# EAGLE board panelBoard_old (EAGLE 6.5.0)
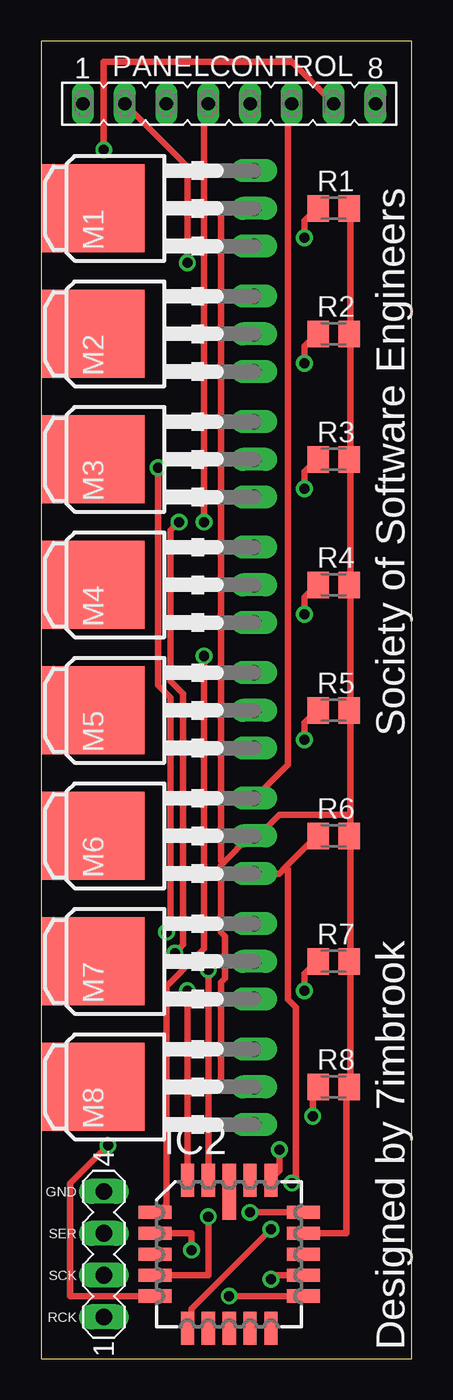
[diagram p0: board, top side]
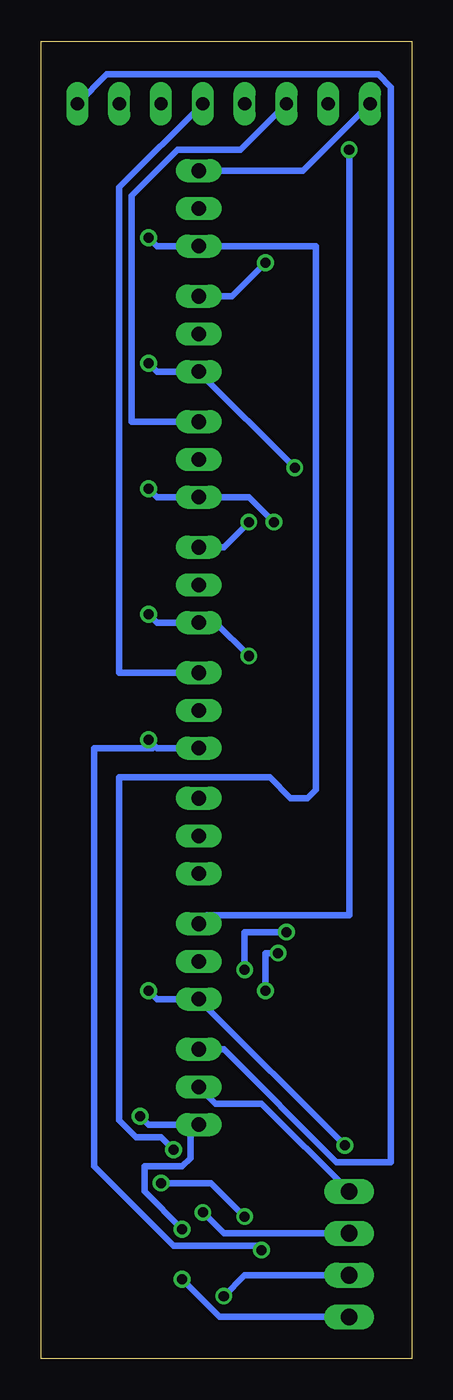
[diagram p1: board, bottom side, seen from below]

Size 22.53 x 80 mm. Coordinates in mm from the lower left corner, seen from the top.
Outline: 0,0 22.53,0 22.53,80 0,80 0,0
Copper layers (1*16): Top 0.035mm / dielectric 1.5mm / Bottom 0.035mm
Design rules "default": minimum track width 10mil, minimum drill 24mil, track to track 8mil, track to pad 8mil, pad to pad 8mil, via to via 8mil, smd to smd 8mil, copper to edge 40mil, drill to drill 8mil, minimum pad ring 10mil, minimum via ring 8mil, stop-mask expansion 4mil, vias tented up to drill 0mil, thermal gap 10mil
Net classes: 0 default: width 0.381 mm, drill 0.508 mm, clearance 0.254 mm

## Footprints (pad centres in the part's own frame; a part is rotated, then mirrored left to right if it is on the bottom)
MA04-1 = drill 1.016 long: 1 -3.81,0; 2 -1.27,0; 3 1.27,0; 4 3.81,0
LCC20 = smd 0.8 x 3.4: 1 0,3.8 | smd 0.8 x 2: 2 -1.27,4.5; 3 -2.54,4.5; 9 -2.54,-4.5; 10 -1.27,-4.5; 11 0,-4.5; 12 1.27,-4.5; 13 2.54,-4.5; 19 2.54,4.5; 20 1.27,4.5 | smd 2 x 0.8: 4 -4.5,2.54; 5 -4.5,1.27; 6 -4.5,0; 7 -4.5,-1.27; 8 -4.5,-2.54; 14 4.5,-2.54; 15 4.5,-1.27; 16 4.5,0; 17 4.5,1.27; 18 4.5,2.54
I-PAK_TO251AA = drill 0.889 long: 1 -2.286,-5.334; 2 0,-5.334; 3 2.286,-5.334 | smd 5.334 x 6.223: 4 0,4.445
FE08 = drill 0.813 long: 1 -8.89,0; 2 -6.35,0; 3 -3.81,0; 4 -1.27,0; 5 1.27,0; 6 3.81,0; 7 6.35,0; 8 8.89,0
M0805 = smd 1.3 x 1.6: 1 -0.95,0; 2 0.95,0

## Placement (x,y rotation side)
CONTROL  [MA04-1]  3.81,6.35 90 top
IC2  74LS595FK  [LCC20]  11.43,6.35 0 top
M1  IRFU5305  [I-PAK_TO251AA]  7.62,69.85 90 top
M2  IRFU5305  [I-PAK_TO251AA]  7.62,62.23 90 top
M3  IRFU5305  [I-PAK_TO251AA]  7.62,54.61 90 top
M4  IRFU5305  [I-PAK_TO251AA]  7.62,46.99 90 top
M5  IRFU5305  [I-PAK_TO251AA]  7.62,39.37 90 top
M6  IRFU5305  [I-PAK_TO251AA]  7.62,31.75 90 top
M7  IRFU5305  [I-PAK_TO251AA]  7.62,24.13 90 top
M8  IRFU5305  [I-PAK_TO251AA]  7.62,16.51 90 top
PANELCONTROL  [FE08]  11.43,76.2 0 top
R1  [M0805]  17.78,69.85 0 top
R2  [M0805]  17.78,62.23 0 top
R3  [M0805]  17.78,54.61 0 top
R4  [M0805]  17.78,46.99 0 top
R5  [M0805]  17.78,39.37 0 top
R6  [M0805]  17.78,31.75 0 top
R7  [M0805]  17.78,24.13 0 top
R8  [M0805]  17.78,16.51 0 top

## Library data of the parts
CONTROL = con-lstb; OC_FARNELL: unknown; OC_NEWARK: unknown
IC2 = 74xx-eu; OC_NEWARK: unknown
M1-M8 = transistor-power; MF: INTERNATIONAL RECTIFIER(IR); MPN: IRFU5305PBF; OC_NEWARK: 63J7093
PANELCONTROL = con-lsta; OC_FARNELL: unknown; OC_NEWARK: unknown
R1-R8 = resistor

## Nets
GND: IC2.10
N$1: M1.3 PANELCONTROL.1
N$2: M2.3 PANELCONTROL.2
N$3: M3.3 PANELCONTROL.3
N$4: M4.3 PANELCONTROL.4
N$5: M5.3 PANELCONTROL.5
N$6: M6.3 PANELCONTROL.6
N$7: M7.3 PANELCONTROL.7
N$8: M8.3 PANELCONTROL.8
N$9: CONTROL.4 IC2.17 M1.2 M2.2 M3.2 M4.2 M5.2 M6.2 M7.2 M8.2 R1.2 R2.2 R3.2 R4.2 R5.2 R6.2 R7.2 R8.2
N$10: IC2.9 M8.1 R8.1
N$11: IC2.19 M1.1 R1.1
N$12: IC2.2 M2.1 R2.1
N$13: IC2.3 M3.1 R3.1
N$14: IC2.4 M4.1 R4.1
N$15: IC2.5 M5.1 R5.1
N$16: IC2.7 M6.1 R6.1
N$17: IC2.8 M7.1 R7.1
N$21: CONTROL.3 IC2.18
N$22: CONTROL.2 IC2.14
N$23: CONTROL.1 IC2.15
VCC: IC2.20

## Tracks (layer width: path | path; a pad name or v marks a point on that pad's centre or on a via)
N$1
  Bottom 0.381: PANELCONTROL.1 6.6,72.14 M1.3
N$2  (via drill 0.61)
  Top 0.381: PANELCONTROL.2 8.89,72.39 v8.89,66.55
  Bottom 0.381: v8.89,66.55 10.92,64.52 M2.3
N$3
  Bottom 0.381: PANELCONTROL.3 10.41,73.41 14.22,73.41 17.02,70.61 17.02,56.9 M3.3
N$4  (via drill 0.61)
  Top 0.381: PANELCONTROL.4 9.91,75.95 v9.91,50.8
  Bottom 0.381: v9.91,50.8 11.43,49.28 M4.3
N$5
  Bottom 0.381: PANELCONTROL.5 17.78,71.12 17.78,41.66 M5.3
N$6
  Top 0.381: PANELCONTROL.6 14.99,75.95 14.99,36.07 M6.3
N$7  (via drill 0.61)
  Top 0.381: PANELCONTROL.7 15.24,78.74 3.81,78.74 v3.81,73.41
  Bottom 0.381: v3.81,73.41 3.81,26.92 12.45,26.92 M7.3
N$8
  Bottom 0.381: PANELCONTROL.8 18.54,77.98 2.03,77.98 1.27,77.22 1.27,11.94 4.57,11.94 11.43,18.8 M8.3
N$9
  Top 0.381: 18.8,62.23 18.8,69.85 R1.2 | 18.8,54.61 18.8,46.99 | 18.8,39.37 18.8,33.02 | 18.8,33.02 18.8,31.75 | 18.8,24.13 18.8,16.51 R8.2 18.54,16.51 18.54,7.62 IC2.17 | 18.8,24.13 18.8,31.75 | 18.8,31.75 R6.2 | 18.8,24.13 R7.2 | 18.8,39.37 18.8,46.99 | 18.8,46.99 R4.2 | 18.8,39.37 R5.2 | 18.8,54.61 18.8,62.23 | 18.8,62.23 R2.2 | 18.8,54.61 R3.2 | 11.18,24.13 M7.2 | 11.18,24.13 11.18,25.65 10.92,25.91 10.92,29.97 11.05,30.1 | 11.05,30.1 12.7,31.75 M6.2 13.21,31.75 14.48,33.02 18.8,33.02 | 10.92,39.37 M5.2 | 10.92,39.37 10.92,30.23 11.05,30.1 | 10.92,46.99 M4.2 | 10.92,39.37 10.92,46.99 | 10.92,54.61 M3.2 | 10.92,46.99 10.92,54.61 | 10.92,62.23 M2.2 | 10.92,54.61 10.92,62.23 | M1.2 10.92,69.85 10.92,62.23 | M8.2 10.92,16.51 10.92,22.86 11.18,23.11 11.18,24.13
  Bottom 0.381: M8.2 11.94,15.49 9.14,15.49 CONTROL.4
N$10  (via drill 0.61)
  Top 0.381: v16.51,14.73 16.51,16.26 16.76,16.51 R8.1 | v13.97,7.87 9.14,3.05 9.14,2.29 8.89,2.03 IC2.9
  Bottom 0.381: v16.51,14.73 16,14.22 13.46,14.22 | v13.97,7.87 16.26,10.16 16.26,11.68 13.97,11.68 13.46,12.19 13.46,14.22 | 13.46,14.22 M8.1
N$11  (via drill 0.61)
  Top 0.381: v16,68.07 16,69.09 16.76,69.85 R1.1 | v14.48,12.7 14.48,11.43 13.97,10.92 IC2.19
  Bottom 0.381: v16,68.07 15.49,67.56 M1.1 5.84,67.56 5.84,34.54 6.35,34.04 7.37,34.04 8.64,35.31 17.78,35.31 17.78,14.48 16.76,13.46 15.24,13.46 v14.48,12.7
N$12  (via drill 0.61)
  Top 0.381: v16,60.45 16,61.47 16.76,62.23 R2.1 | v10.16,23.62 IC2.2 | v7.62,25.91 7.87,26.16 7.87,40.13 7.11,40.89 v7.11,54.1
  Bottom 0.381: v16,60.45 15.49,59.94 M2.1 v7.11,54.1 | v10.16,23.62 10.16,25.91 v7.62,25.91
N$13  (via drill 0.61)
  Top 0.381: v16,52.83 16,53.85 16.76,54.61 R3.1 | v8.89,22.35 IC2.3 | v8.13,24.64 8.64,25.15 8.64,40.39 7.87,41.15 7.87,50.29 v8.38,50.8
  Bottom 0.381: v16,52.83 15.49,52.32 M3.1 9.91,52.32 v8.38,50.8 | v8.89,22.35 8.89,24.64 v8.13,24.64
N$14  (via drill 0.61)
  Top 0.381: v16,45.21 16,46.23 16.76,46.99 R4.1 | v9.91,42.67 9.91,24.89 7.62,22.61 7.62,9.4 7.11,8.89 IC2.4
  Bottom 0.381: v16,45.21 15.49,44.7 M4.1 11.94,44.7 v9.91,42.67
N$15  (via drill 0.61)
  Top 0.381: v16,37.59 16,38.61 16.76,39.37 R5.1 | IC2.5 9.14,7.62 v9.14,6.6
  Bottom 0.381: 15.62,37.21 15.49,37.08 M5.1 | 15.62,37.21 v16,37.59 | v9.14,6.6 9.4,6.86 14.48,6.86 19.3,11.68 19.3,37.08 15.75,37.08 15.62,37.21
N$16  (via drill 0.61)
  Top 0.381: 14.86,29.84 14.48,29.46 M6.1 | 14.86,29.84 16.76,31.75 R6.1 | IC2.7 10.16,5.08 v10.16,8.64 | v15.24,10.67 15.49,10.92 15.49,21.34 14.99,21.84 14.99,29.72 14.86,29.84
  Bottom 0.381: v10.16,8.64 12.19,10.67 v15.24,10.67
N$17  (via drill 0.61)
  Top 0.381: v16,22.35 16,23.37 16.76,24.13 R7.1 | IC2.8 1.78,3.81 1.78,10.67 v4.06,12.95
  Bottom 0.381: v16,22.35 15.49,21.84 M7.1 v4.06,12.95
N$21  (via drill 0.61)
  Top 0.381: v12.7,8.89 IC2.18
  Bottom 0.381: v12.7,8.89 11.43,7.62 CONTROL.3
N$22  (via drill 0.61)
  Top 0.381: v11.43,3.81 IC2.14
  Bottom 0.381: v11.43,3.81 10.16,5.08 CONTROL.2
N$23  (via drill 0.61)
  Top 0.381: IC2.15 13.97,5.08 v13.97,4.83
  Bottom 0.381: v13.97,4.83 11.68,2.54 CONTROL.1

## Text on the board
tNames: Society of Software Engineers | Designed by 7imbrook | GND | SER | SCK | RCK